# Altium PCB Automatic Water Pump Controller.PcbDoc
Units mm, origin at the board's own origin, x right, y up, seen from the top; angles counter-clockwise.
Board outline 79.6 x 78 mm, 2 copper layers (Top Layer, Bottom Layer); 35 components, 31 nets, 99 pads, 6 vias.
Unrouted connection lines stored in the file: 1.
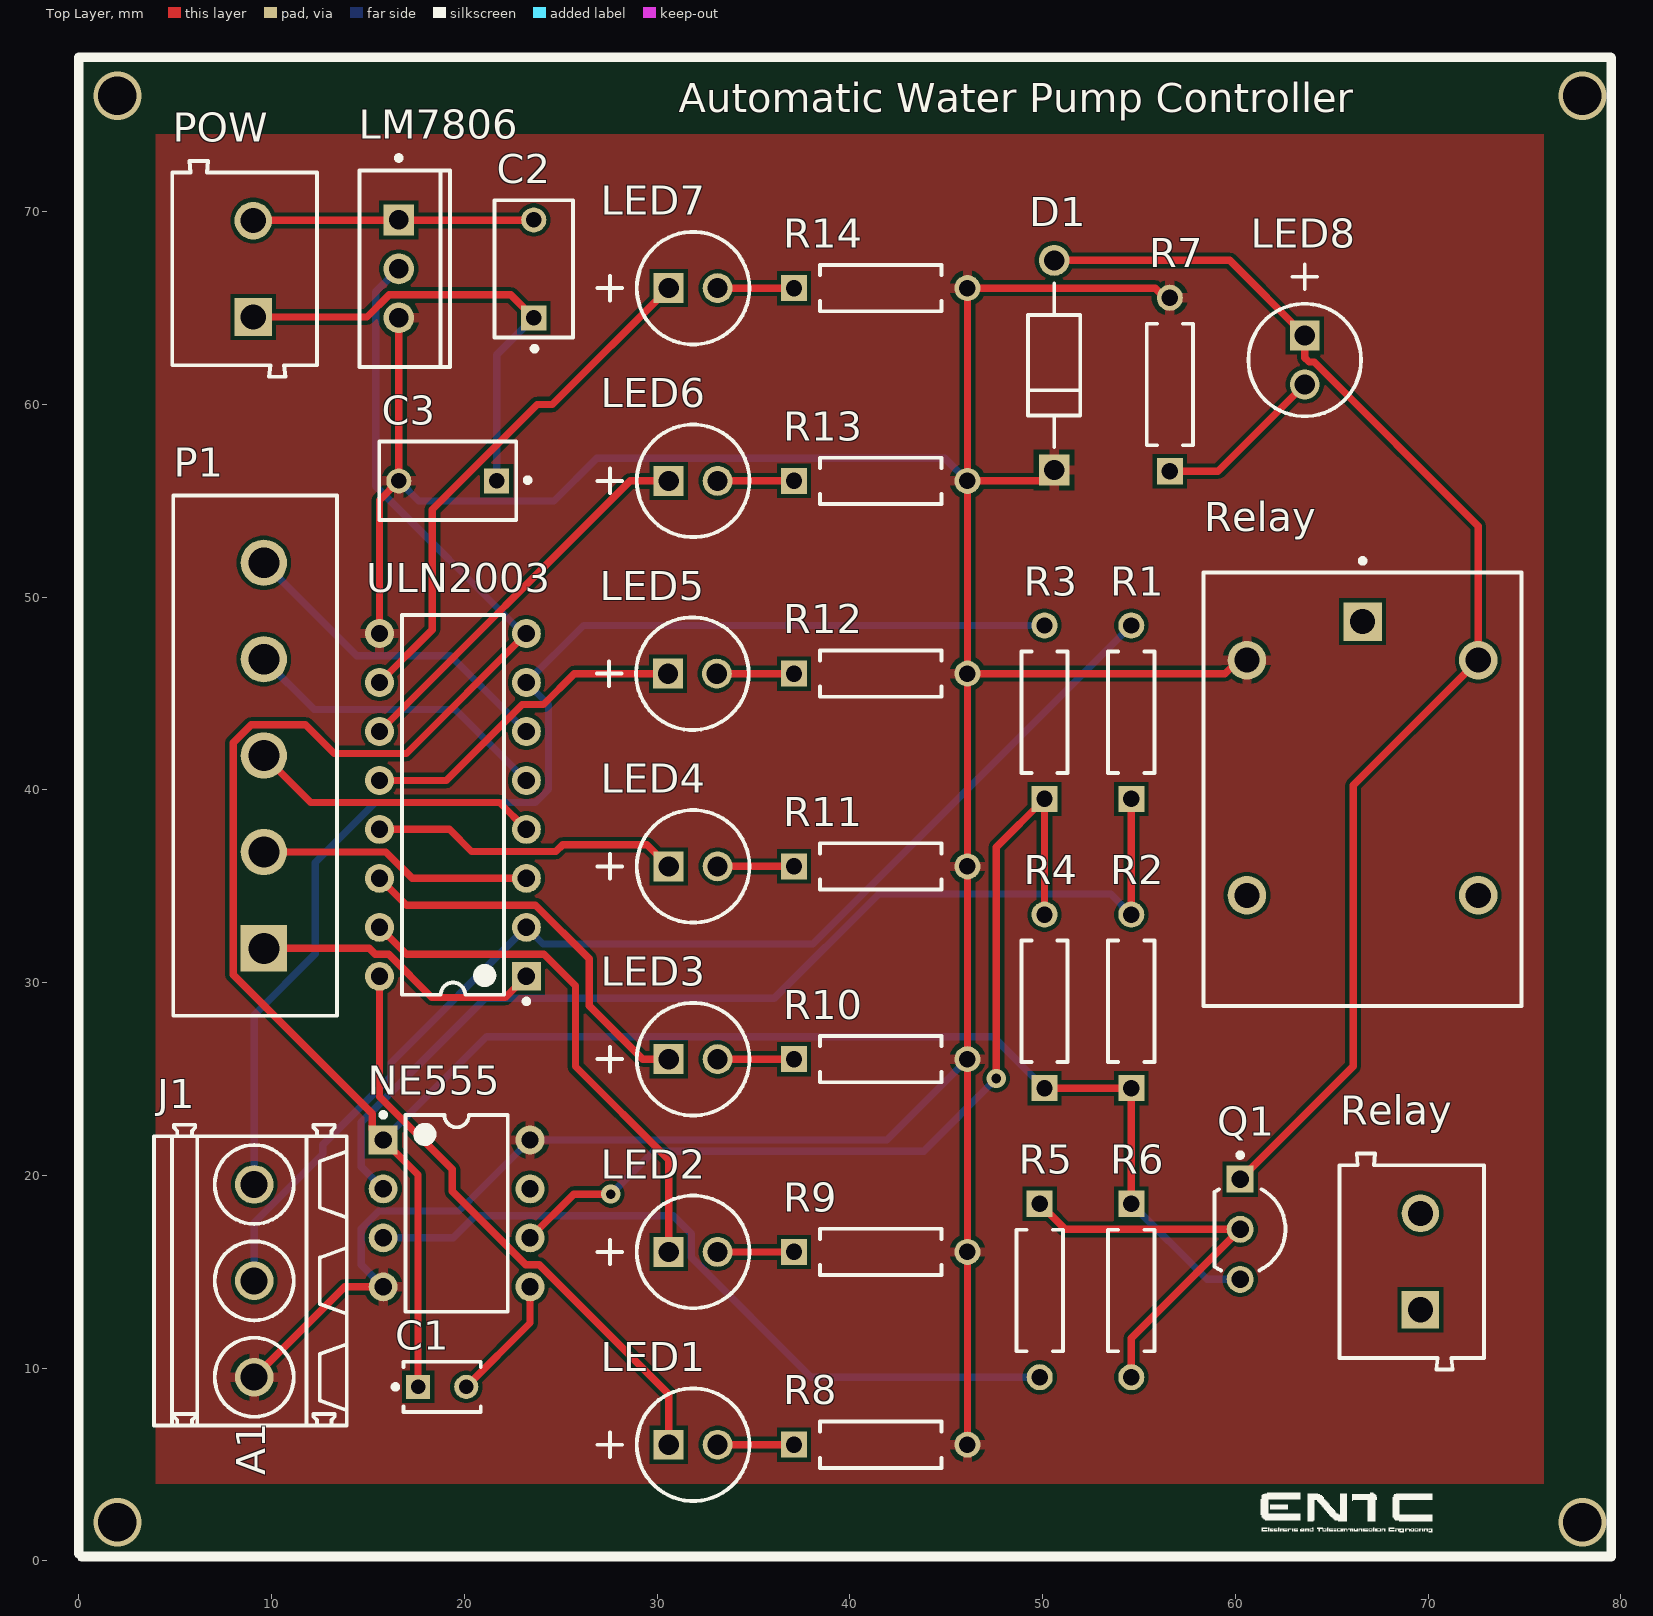
[diagram p0: Top Layer view]
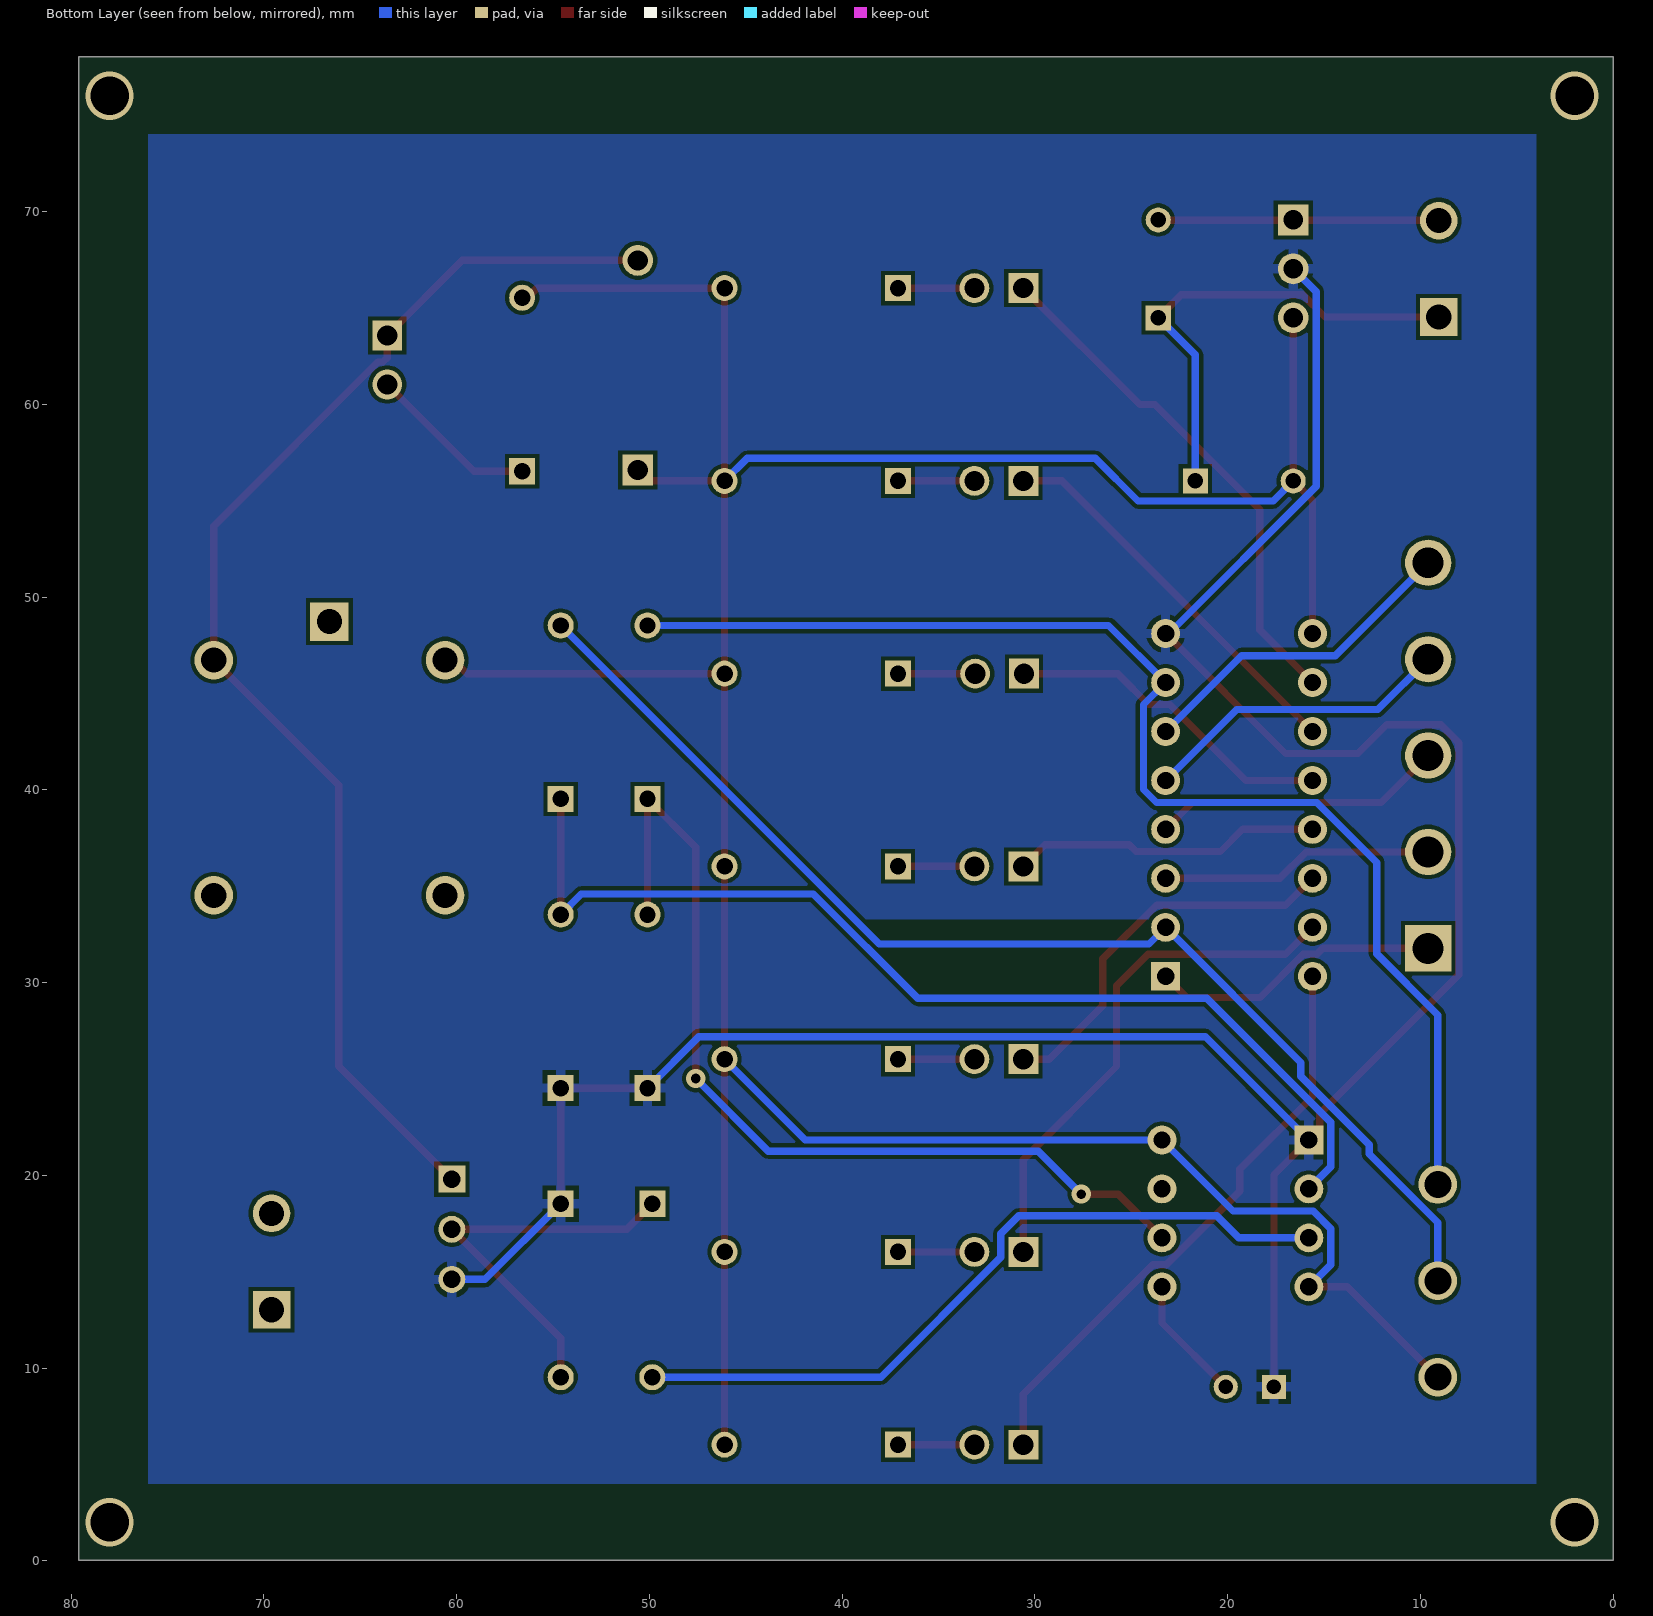
[diagram p1: Bottom Layer view, seen from below]

## Layer stack, top to bottom
Top Solder: solder mask 0.0102, Solder Resist, Dk 3.5
Top Layer: signal copper 0.0356
Dielectric 1: dielectric 0.32, FR-4, Dk 4.8
Bottom Layer: signal copper 0.0356
Bottom Solder: solder mask 0.0102, Solder Resist, Dk 3.5

## Board outline
0,0.025 79.6,0.025 79.6,78.025 0,78.025

## Design rules (kind name [scope] priority, off if disabled: settings)
BoardOutlineClearance [All] p1: gap=0.2 ignorepadtopadclearanceinfootprint=FALSE except(0.4: Arc-SplitBarrior Arc-SplitContinuation Track-SplitBarrior Track-SplitContinuation SMDPad-SplitBarrior SMDPad-SplitContinuation THPad-SplitBarrior THPad-SplitContinuation Via-SplitBarrior Via-SplitContinuation Fill-SplitBarrior Fill-SplitContinuation Poly-SplitBarrior Poly-SplitContinuation Region-SplitBarrior Region-SplitContinuation Text-SplitBarrior Text-SplitContinuation)
Clearance "Clearance Bottom Layer" [OnLayer('Bottom Layer')] p1: gap=0.203 ignorepadtopadclearanceinfootprint=TRUE except(0.254: Arc-Text Track-Text SMDPad-Text THPad-Text Via-Text Fill-Text Poly-Text Region-Text Text-Text)
Clearance "Clearance Top Layer" [OnLayer('Top Layer')] p2: gap=0.203 ignorepadtopadclearanceinfootprint=TRUE except(0.254: Arc-Text Track-Text SMDPad-Text THPad-Text Via-Text Fill-Text Poly-Text Region-Text Text-Text)
Clearance [All] p3: gap=0.2 ignorepadtopadclearanceinfootprint=FALSE except(0.089: Arc-Arc Arc-Track Arc-SMDPad Track-Track Track-SMDPad SMDPad-SMDPad; 0.127: Arc-Via Track-Via SMDPad-Via THPad-Via Via-Via; 0.254: Arc-Text Track-Text SMDPad-Text THPad-Text Via-Text Fill-Text Poly-Text Region-Text Text-Text)
HoleSize [All] p1: absolutevalues=TRUE maxlimit=6.3 minlimit=0.2 maxpercent=80.000 minpercent=20.000
MinimumAnnularRing [All] p1: minimumring=0.076
MinimumSolderMaskSliver [All] p1: minsoldermaskwidth=0.1
PolygonConnect PolygonConnect_1 [All] p1: thpad.connectstyle=Relief thpad.reliefconductorwidth=0.508 thpad.reliefentries=4 thpad.polygonreliefangle="90 Angle" thpad.airgapwidth=0.254 smdpad.connectstyle=Relief smdpad.reliefconductorwidth=0.508 smdpad.reliefentries=4 smdpad.polygonreliefangle="90 Angle" smdpad.airgapwidth=0.254 via.connectstyle=Direct via.reliefconductorwidth=0.508 via.reliefentries=4 via.polygonreliefangle="90 Angle" via.airgapwidth=0.254
RoutingCorners [All] p1: cornerstyle=Round minsetback=2.54 maxsetback=2.54
RoutingVias [All] p1: holewidth=0.5 width=1 viastyle="Through Hole" minholewidth=0.2 minwidth=0.45 maxholewidth=1 maxwidth=2
SilkToSilkClearance [All] p1: silktosilkclearance=0.1
SilkToSolderMaskClearance [IsPad] p1: minsilkscreentomaskgap=0.1 clearancetoexposedcopper=TRUE
SolderMaskExpansion [All] p1: expansion=0.102 istentingtop=FALSE
Width [All] p1: maxlimit=2.54 minlimit=0.089 preferedwidth=0.381
25 further rules are at their usual default settings.

## Components (designator, comment, footprint, x,y, rotation, side; value= is the part's Value field where it differs from the comment)
C1 "K104K15X7RF5TL2" VISH-K104K15X7RF5TL2 18.85,9.025 r0 top
C2 "C330C105M5U5TA" KEMT-C330C105M5U5TA 23.6,67.025 r90 top
C3 "C330C105M5U5TA" KEMT-C330C105M5U5TA 19.14,56.025 r180 top
D1 "IN4007" FP-1N4007-MFG 50.6,62.025 r90 top value=15pF
J1 "1715320000" LM_5_00_90_03 8.9,14.525 r90 top
LED1 "HLMP-3301" AVAG-HLMP-3301-2 30.6,6.025 r0 top
LED2 "HLMP-3301" AVAG-HLMP-3301-2 30.6,16.025 r0 top
LED3 "HLMP-3301" AVAG-HLMP-3301-2 30.6,26.025 r0 top
LED4 "HLMP-3301" AVAG-HLMP-3301-2 30.6,36.025 r0 top
LED5 "HLMP-3301" AVAG-HLMP-3301-2 30.56,46.025 r0 top
LED6 "HLMP-3301" AVAG-HLMP-3301-2 30.6,56.025 r0 top
LED7 "HLMP-3301" AVAG-HLMP-3301-2 30.6,66.025 r0 top
LED8 "HLMP-3301" AVAG-HLMP-3301-2 63.6,63.565 r270 top
LM7806 "LM7806" FAIR-TO-220-3 16.6,67.025 r0 top
NE555 "NE555" P0008A 19.6,18.025 r0 top
P1 "691311700105" 691311700105 9.15,41.775 r90 top
POW "691102710002" 691102710002 8.6,67.025 r90 top
Q1 "BC547BRL1G" ONSC-TO-92-3-29-11_AM_BL 60.25,17.2 r270 top
R1 "MFR-25FBF52-475K" RESA60-630X240 54.6,44.025 r90 top value=22K
R2 "MFR-25FBF52-475K" RESA60-630X240 54.6,29.025 r90 top value="1 M"
R3 "MFR-25FBF52-475K" RESA60-630X240 50.1,44.025 r90 top value="22 K"
R4 "MFR-25FBF52-475K" RESA60-630X240 50.1,29.025 r90 top value="1 M"
R5 "MFR-25FBF52-475K" RESA60-630X240 49.85,14.025 r270 top value="1 K"
R6 "MFR-25FBF52-475K" RESA60-630X240 54.6,14.025 r270 top value="220 K"
R7 "MFR-25FBF52-475K" RESA60-630X240 56.6,61.025 r90 top value="470 Ohm"
R8 "MFR-25FBF52-475K" RESA60-630X240 41.6,6.025 r0 top value="330 Ohm"
R9 "MFR-25FBF52-475K" RESA60-630X240 41.6,16.025 r0 top value="330 Ohm"
R10 "MFR-25FBF52-475K" RESA60-630X240 41.6,26.025 r0 top value="330 Ohm"
R11 "MFR-25FBF52-475K" RESA60-630X240 41.6,36.025 r0 top value="330 Ohm"
R12 "MFR-25FBF52-475K" RESA60-630X240 41.6,46.025 r0 top value="330 Ohm"
R13 "MFR-25FBF52-475K" RESA60-630X240 41.6,56.025 r0 top value="330 Ohm"
R14 "MFR-25FBF52-475K" RESA60-630X240 41.6,66.025 r0 top value="330 Ohm"
Relay "G5LE-14-DC5" FP-G5LE-14-DC5-MFG 66.6,40.025 r270 top
Relay "691102710002" 691102710002 69.15,15.525 r90 top
ULN2003 "ULN2003AN" N0016A 19.41,39.215 r180 top

## Footprints (in the part's own frame and the unit in brackets; to place one, negate y for a bottom-side part, rotate by r counter-clockwise, add the part's x,y. Pads: shape width x height; smd on the part's side, far side on the other; paste and mask are expansions set on the pad)
691102710002 [mm] "5,00mm - modular - blue - Horizontal entry with pressure clamp - 9,9 mm height - 02p"
  rect 1.95x1.95 hole 1.3: 1(-2.5,-0.45)
  round 1.95 hole 1.3: 2(2.5,-0.45)
  silkscreen extent -5.6,-3.75 5.6,3.75, body extent -5.6,-3.75 5.6,3.75, height 9.96
691311700105 [mm] "5.00mm - PCB Vertical Closed - 05p"
  rect 2.4x2.4 hole 1.6: 1(-10,-0.45)
  round 2.4 hole 1.6: 2(-5,-0.45) 3(0,-0.45) 4(5,-0.45) 5(10,-0.45)
  silkscreen extent -13.5,-4.25 13.5,4.25, body extent -13.5,-4.25 13.5,4.25, height 12.1
AVAG-HLMP-3301-2 [mm] "THD, 2-Leads, Body Dia 5.85mm"
  rect 1.55x1.55 hole 1.05: 1(0,0)
  round 1.55 hole 1.05: 2(2.54,0)
  silkscreen extent -3.68,-2.92 4.19,2.92
FAIR-TO-220-3 [mm] "FM, 3-Leads, Body 10.2x4.7mm, Pitch 2.54mm"
  rect 1.6x1.6 hole 1: 1(0,2.54)
  round 1.6 hole 1: 2(0,0) 3(0,-2.54)
  silkscreen extent -2.04,-5.1 2.66,5.87, body extent -2.04,-5.1 2.66,5.1, height 18.95
FP-1N4007-MFG [mm]
  rect 1.6x1.6 hole 1.05 paste-1000 mask+0: 1(-5.438,0)
  round 1.6 hole 1.05 paste-1000 mask+0: 2(5.438,0)
  silkscreen extent -4.24,-1.35 4.24,1.35, body extent -6.34,-1.45 6.34,1.45, height 0.25
FP-G5LE-14-DC5-MFG [mm]
  rect 2x2 hole 1.3 paste-1000 mask+0: 1(-8.7,0)
  round 2 hole 1.3 paste-1000 mask+0: 2(-6.7,-6) 3(5.5,-6) 4(5.5,6) 5(-6.7,6)
  silkscreen extent -11.97,-8.25 11.25,8.25, body extent -11.35,-8.35 11.35,8.35, height 0.25
KEMT-C330C105M5U5TA [mm] "THD, 2-Leads, Body 7.11x4.07mm"
  rect 1.3x1.3 hole 0.8: 1(-2.54,0)
  round 1.3 hole 0.8: 2(2.54,0)
  silkscreen extent -4.27,-2.03 3.55,2.03, body extent -3.55,-2.03 3.55,2.03, height 9.14
LM_5_00_90_03 [mm] "OMNIMATE Signal - Serie LM  LM 5.00/03/90 3.5"
  round 2 hole 1.4: A1(-5,-0.2) A2(0,-0.2) A3(5,-0.2)
  silkscreen extent -7.5,-5 8.1,5, body extent -7.5,-5 8.1,5, height 13.81
N0016A [mm] "DIP, 16-Leads, Body 19.7x6.6mm, Pitch 2.54mm"
  rect 1.5x1.5 hole 0.9: 1(-3.81,8.89)
  round 1.5 hole 0.9: 2(-3.81,6.35) 3(-3.81,3.81) 4(-3.81,1.27) 5(-3.81,-1.27) 6(-3.81,-3.81) 7(-3.81,-6.35) 8(-3.81,-8.89) 9(3.81,-8.89) 10(3.81,-6.35) 11(3.81,-3.81) 12(3.81,-1.27) 13(3.81,1.27) 14(3.81,3.81) 15(3.81,6.35) 16(3.81,8.89)
  silkscreen extent -3.94,-9.85 2.65,10.31, body extent -3.95,-9.85 3.95,9.85, height 5.08
ONSC-TO-92-3-29-11_AM_BL [mm] "TO, 3-Leads, Body Dia 4.7mm, Pitch 2.6mm"
  rect 1.4x1.4 hole 0.9: 1(-2.6,0)
  round 1.4 hole 0.9: 2(0,0) 3(2.6,0)
  silkscreen extent -3.97,-1.34 2.13,2.35, body extent -2.84,-1.34 2.84,2.35, height 5.33
P0008A [mm] "DIP, 8-Leads, Body 10.15x6.6mm, Pitch 2.54mm"
  rect 1.5x1.5 hole 0.9: 1(-3.81,3.81)
  round 1.5 hole 0.9: 2(-3.81,1.27) 3(-3.81,-1.27) 4(-3.81,-3.81) 5(3.81,-3.81) 6(3.81,-1.27) 7(3.81,1.27) 8(3.81,3.81)
  silkscreen extent -3.93,-5.1 2.65,5.23, body extent -3.95,-5.07 3.95,5.07, height 5.08
RESA60-630X240 [mm] "Axial Resistor, 2-Leads, Dia 2.4mm, Body Length 6.3mm"
  rect 1.35x1.35 hole 0.85: 1(-4.5,0)
  round 1.35 hole 0.85: 2(4.5,0)
  silkscreen extent -3.15,-1.2 3.15,1.2, body extent -4.77,-1.19 4.77,1.2, height 2.4
VISH-K104K15X7RF5TL2 [mm] "THD, 2-Leads, Body 4x2.6mm"
  rect 1.25x1.25 hole 0.75: 1(-1.25,0)
  round 1.25 hole 0.75: 2(1.25,0)
  silkscreen extent -2.55,-1.3 2,1.3, body extent -2,-1.3 2,1.3, height 5.6

## Part data
C1: library part CMP-2000-06508-1, "Ceramic Capacitor, 100 nF, +/- 10%, 50 V, -55 to 125 degC, 2-Pin THD, RoHS, Tape and Reel", Capacitance=0.1µF, Manufacturer=Vishay, Operating Temperature=-55°C~125°C, Package / Case=Radial, Package Description="2-Pin Through Hole Device, Body 4 x 2.6 mm", Ratings=-, Standard Package=1, Temperature Coefficient=X7R, Tolerance=±10%, Voltage - Rated=50V, Applications=GeneralPurpose, Catalog Drawings=Mono-KapSide2-15_5.58Mono-KapSide1_15, Category=Capacitors, Datasheet URL=http://www.vishay.com/docs/45171/kseries.pdf, Datasheet Version=08/2013, Family=CeramicCapacitors, Features=-, Height - Seated (Max)="0.220\"(5.58mm)", Lead Spacing="0.098\"(2.50mm)", Lead Style=Straight, Manufacturer URL=http://www.vishay.com/, Mounting Technology=ThroughHole, Mounting Type=ThroughHole, Online Catalog=Mono-Kap™Series, Other Names=BC1084CT, Package Reference=K104K15X7RF5TL2, Packaging=CutTape(CT), Series=Mono-Kap™K, Size / Dimension="0.157\"Lx0.098\"W(4.00mmx2.50mm)", Thickness (Max)=-
C2: library part CMP-2000-06056-1, "Ceramic Capacitor, 1 uF, +/- 20%, 50 V, -10 to 85 degC, 2-Pin THD, RoHS, Bulk", Capacitance=0.47µF, Manufacturer=Kemet, Operating Temperature=10°C~85°C, Package / Case=Radial, Package Description="2-Pin Through Hole Device, Body 7.11 x 4.07 mm", Ratings=-, Standard Package=250, Temperature Coefficient=Z5U, Tolerance=±20%, Voltage - Rated=50V, Applications=GeneralPurpose, Catalog Drawings=C330(std), Category=Capacitors, Datasheet URL=http://www.kemet.com/Lists/ProductCatalog/Attachments/599/KEM_C1051_GOLDMAX_Z5U.pdf, Datasheet Version=12/2015, Family=CeramicCapacitors, Features=-, Height - Seated (Max)="0.360\"(9.14mm)", Lead Spacing="0.200\"(5.08mm)", Lead Style=Straight, Manufacturer URL=http://www.kemet.com/, Mounting Technology=ThroughHole, Mounting Type=ThroughHole, Online Catalog=GoldenMax™Series, Other Names=399-4390, Package Reference=C330C105M5U5TA, Packaging=Bulk, PCN Design/Specification=C3yySeriesGoldenMaxLeadConfiguration02/Feb/2015, Product Training Modules=CapacitorBasics-TypicalUsesforCapacitors, Series=GoldenMax™, Size / Dimension="0.300\"Lx0.150\"W(7.62mmx3.81mm)", Thickness (Max)=-
C3: library part CMP-2000-06056-1, "Ceramic Capacitor, 1 uF, +/- 20%, 50 V, -10 to 85 degC, 2-Pin THD, RoHS, Bulk", Capacitance=0.1µF, Manufacturer=Kemet, Operating Temperature=10°C~85°C, Package / Case=Radial, Package Description="2-Pin Through Hole Device, Body 7.11 x 4.07 mm", Ratings=-, Standard Package=250, Temperature Coefficient=Z5U, Tolerance=±20%, Voltage - Rated=50V, Applications=GeneralPurpose, Catalog Drawings=C330(std), Category=Capacitors, Datasheet URL=http://www.kemet.com/Lists/ProductCatalog/Attachments/599/KEM_C1051_GOLDMAX_Z5U.pdf, Datasheet Version=12/2015, Family=CeramicCapacitors, Features=-, Height - Seated (Max)="0.360\"(9.14mm)", Lead Spacing="0.200\"(5.08mm)", Lead Style=Straight, Manufacturer URL=http://www.kemet.com/, Mounting Technology=ThroughHole, Mounting Type=ThroughHole, Online Catalog=GoldenMax™Series, Other Names=399-4390, Package Reference=C330C105M5U5TA, Packaging=Bulk, PCN Design/Specification=C3yySeriesGoldenMaxLeadConfiguration02/Feb/2015, Product Training Modules=CapacitorBasics-TypicalUsesforCapacitors, Series=GoldenMax™, Size / Dimension="0.300\"Lx0.150\"W(7.62mmx3.81mm)", Thickness (Max)=-
D1: library part CMP-02540-000046-1, "DIODE GEN PURP 1KV 1A DO204AL", Capacitance=15pF, Forward Current=1A, Manufacturer=Vishay, Manufacturer Part Number=1N4007-E3/54, Max Junction Temp=+150°C, Max Repetitive Reverse Voltage=1000V, Max Surge Forward Current=30A, Package=1N4007, Peak Reverse Current=30uA, Temperature="-50°C to +150°C", Temperature Range Low=-50°C, Automotive=No, Category=Diode, ComponentLink2Description=Datasheet, ComponentLink2URL=http://www.vishay.com/docs/88503/1n4001.pdf, Device Class L1="Discrete Semiconductors", Device Class L2=Diodes, Device Class L3="Rectifier Diodes", Digikey Description="DIODE GEN PURP 1KV 1A DO204AL", Height=2.7mm, Ipc Land Pattern Name=DIOPA1088W105L520D270, Lead Free=Yes, Mouser Description="Rectifiers Vr/1000V Io/1A", Octopart=https://octopart.com/1n4007-e3%2F54-vishay-39548207, RoHS=TRUE, Temperature Range High=+150°C
J1: library part CMP-1559-01747-1, "OMNIMATE Signal - series LM", Colour=Orange, Manufacturer=Weidmueller, Rated_current_use_group_B_UL_1059="15 A", Rated_voltage_for_surge_voltage_class_pollution_degree_II_2="630 V", Rated_voltage_use_group_B_UL_1059="300 V", UL_94_flammability_rating=V-0, ComponentLink1Description="Manufacturer URL", ComponentLink1URL=http://www.weidmueller.com/, ComponentLink2Description="URL Link1", ComponentLink2URL=http://catalog.weidmueller.com/catalog/Start.do?localeId=en&ObjectID=1715320000, Contact_material=Cu-Leg, Contact_surface=tinned, Insulating_material="Wemid (PA)", Mounting_onto_the_PCB="Solder connection", No_of_poles=3, PackageReference=LM_5_00_90_03, Packaging=Box, PartNumber=1715320000, Pitch_inch="0,197 inch", Pitch_mm="5 mm", Qty="500 PCS", Revision=V1, Short_text_for_material="LM 5.00/03/90 3.5SN OR BX", Side_termination_characteristic="closed side", Solder_pin_length_mm="3,5 mm", Solid_max_H05_07_V_U="2,5 mm²", Solid_min_H05_07_V_U="0,2 mm²", Wire_cross_section_AWG_max_UL_1059="AWG 14", Wire_cross_section_AWG_min_UL_1059="AWG 24"
LED1 LED2 LED3 LED4 LED5 LED6 LED7 LED8: library part CMP-2000-06411-1, "T-1 3/4 (5 mm) Diffused LED Lamp, 1.9 V, -40 to 100 degC, 2-Pin THD, RoHS, Bulk", Emitting Color=Red, Forward Current=25mA, Forward Voltage=2.4V, Manufacturer=Avago, Operating Temp Range=-40Cto100C, Operating Temperature Classification=Industrial, Package Description="2-Pin Through Hole LED, Dia 5.85 mm", Package Type=T-13/4, Power Dissipation=85W, Reverse Voltage=5V, Test Current (It)=10mA, Chip Material=GaP, Datasheet URL=http://www.avagotech.com/docs/AV02-1558EN, Datasheet Version=03/2015, DELETED=Compliant, Dominant Wave Length=626nm, High Brightness=No, Lens Dimensions=5.08x5.08x8.3mm, Lens Type=ColoredDiffused, Lum Intensity=5.4mcd, Luminous Intensity=5.4mcd, Main Category=StandardLED, Manufacturer URL=http://www.avagotech.com/, Mounting=ThroughHole, Mounting Technology=ThroughHole, Number of  Elements=1, Package Reference=HLMP-3301, Packaging=TapeandReel, Peak Wavelength=635nm, Pin Count=2, Product Depth (mm)=6.1mm, Product Height (mm)=9.19mm, Product Length (mm)=6.1mm, Rad Hardened=No, Shape Type=Circular, Type=Uni-Color, Viewing Angle=60deg
LM7806: library part CMP-2000-04938-1, "Positive Voltage Regulator, 5 V, 1 A, -40 to 125 degC, 3-Pin TO-220, RoHS, Tube", Manufacturer=FairchildSemiconductor, Maximum Input Voltage=35V, Maximum Output Current=2.2(Typ)A, Maximum Quiescent Current=8mA, Operating Temperature=-40to125degC, Output Voltage=5V, Package=3TO-220AB, Package Description="3-Pin Through Hole Device, Body 10 x 4.5 mm, Pitch 2.54 mm", Package Reference=TO-220, Typical Dropout Voltage @ Current=2@1AV, Accuracy=±4%, Category=LinearRegulator, Datasheet URL=https://datasheet.ciiva.com/26904/lm7805ct-26904988.pdf, Datasheet Version=Aug-12, Line Regulation=100mV, Load Regulation=100mV, Manufacturer URL=https://www.fairchildsemi.com/, Mounting=ThroughHole, Number of Outputs=1, Output Type=Fixed, Package URL=https://www.fairchildsemi.com/package-drawings/TO/TO220B03.pdf, Packaging=Rail/Tube, Polarity=Positive, Rad Hard=No, Type=Linear
NE555: library part CMP-2000-04954-1, "Precision Timer, 4.5 to 16 V, 0 to 70 degC, 8-Pin DIP, Pb-Free, Tube", Manufacturer=TexasInstruments, Maximum High Level Output Current=-200mA, Maximum Low Level Output Current=200mA, Operating Supply Voltage=5, Package=8PDIP, Package Description="8-Pin Double In-line Package, Body 9.59 x 6.35 mm, Pitch 2.54 mm", Package Reference=P8, Category=Timer, Datasheet URL=http://www.ti.com/general/docs/lit/getliterature.tsp?genericPartNumber=NE555&fileType=pdf, Datasheet Version="Rev. I, 09/2014", Manufacturer URL=http://www.ti.com/, Number of Internal Timers=1, Package URL=http://www.ti.com/lit/ml/mpdi001b/mpdi001b.pdf, Packaging=Rail/Tube, Rad Hard=No, Type=Standard
P1: library part CMP-1502-02036-1, "Serie 3117 - 5.00mm Close Vertical PCB Header WR-TBL, 5 pin", Manufacturer="Wurth Elektronik", Operating Temperature=-40to105degC, Datasheet URL=http://katalog.we-online.de/em/datasheet/6913117001xx.pdf, Gender=Male, Manufacturer URL=http://www.we-online.de, Mounting Technology=THT, Package Reference=691311700105, Packaging=Box, Part Number=691311700105, Pin Number=5, Pitch=5.00mm, Publisher=WurthElektronik
POW Relay: library part CMP-1502-03258-1, "Series 102 - 5.00 mm Horizontal Entry Modular with Pressure Clamp WR-TBL, 2 pin", Manufacturer="Wurth Elektronik", Operating Temperature=-40to105degC, Datasheet URL=http://katalog.we-online.de/em/datasheet/6911027100xx.pdf, Manufacturer URL=http://www.we-online.de, Mounting Technology=THT, Package Reference=691102710002, Packaging=Box, Part Number=691102710002, Pin Number=2, Pitch=5.00mm, Publisher=WurthElektronik
Q1: library part CMP-1048-01605-1, "Amplifier Transistor, NPN Silicon, 3-Pin TO-92, Pb-Free, Tape and Reel", Manufacturer="On Semiconductor", ComponentLink1Description="Manufacturer URL", ComponentLink1URL=http://www.onsemi.com/, ComponentLink2Description=Datasheet, ComponentLink2URL=http://www.onsemi.com/pub_link/Collateral/BC546-D.PDF, ComponentLink3Description="Package Specification", ComponentLink3URL=http://www.onsemi.com/pub_link/Collateral/MAC97-D.PDF, DatasheetVersion="Rev. 7", fT Min (MHz)=150, IC Continuous (A)=0.1, Mounting Technology="Through Hole", PackageDescription="3-Pin Transistor Outline, Body 4.825 x 3.685 mm, Pitch 1.27 mm", PackageReference=TO-92-3-29-11_AM_BL, PackageVersion="Rev. AM", Packing="Tape and Reel", PartNumber=BC547BRL1G, Polarity=NPN, RoHS=TRUE
R1 R2 R3 R4 R5 R6 R7 R8 R9 R10 R11 R12 R13 R14: library part CMP-009-00055-4, "Axial Resistor, 475 KOhm, +/- 1%, 0.25 W, -55 to 155 degC, 2-Pin THD, RoHS, Bulk", Case/Package=Axial, Manufacturer=Yageo, Max Operating Temperature=155°C, Min Operating Temperature=-55°C, Package Description="2-Pin Axial Lead, Dia 2.4 mm, Body Length 6.3 mm", Package Quantity=200, Package Reference=MFR-25, Power=250mW, Tolerance=1%, Voltage Rating=250V, Datasheet URL=http://www.yageo.com/documents/recent/Yageo%20LR_MFR_2013.pdf, Datasheet Version=Apr-13, Manufacturer URL=http://www.yageo.com/, Mounting Technology=TH, Packaging=Bulk, RoHS Compliant=True
Relay: library part CMP-08822-000008-1, "RELAY GEN PURPOSE SPDT 10A 5V", Ambient Temperature Range High=+85°C, Ambient Temperature Range Low=-25°C, Coil Current=79.4mA, Coil Power=400mW, Coil Resistance=63Ω, Coil Voltage=5V, Current Rating=10A, Manufacturer=Omron, Package=0, Temperature="-25°C to +85°C", Automotive=No, Category=Relay, Coil Type=Non-Latching, ComponentLink2Description=Datasheet, ComponentLink2URL=https://omronfs.omron.com/en_US/ecb/products/pdf/en-g5le.pdf, Device Class L1=Electromechanical, Device Class L2=Relays, Device Class L3="Power Relays", Digikey Description="RELAY GEN PURPOSE SPDT 10A 5V", Height=19mm, Lead Free=Yes, Manufacturer Part Number=G5LE-14-DC5, Mouser Description="General Purpose Relays Power PCB Relay SPDT Sealed 5VDC", Number Of Contacts=1, Octopart=https://octopart.com/g5le-14-dc5-omron-28829, RoHS=TRUE, Standoff Height=0.5mm, Switching Current=10A, Temperature Range High=+85°C, Temperature Range Low=-25°C, Throw Configuration=SPDT
ULN2003: library part CMP-2000-07352-1, "High-Voltage, High-Current Darlington Transistor Array, 50 V, 500 mA, -20 to 70 degC, 16-Pin PDIP (N), Pb-Free (RoHS), Tube", Manufacturer=TexasInstruments, Maximum Collector Emitter Saturation Voltage=1.1@100mA, Maximum Collector Emitter Voltage=50V, Package=16PDIP, Package Description="16-Pin Plastic In-Line, Body 19.305 x 6.35 mm, Pitch 2.54 mm", Package Reference=N16, Package Version="4040049/E, 12/2002", Peak DC Collector Current=0.5A, Category=DarlingtonBJT, Configuration=Array7, Datasheet URL=http://www.ti.com/general/docs/lit/getliterature.tsp?genericPartNumber=uln2003a&fileType=pdf, Datasheet Version="Rev. O, 01/2016", Manufacturer URL=http://www.ti.com/, Mounting=ThroughHole, Mounting Technology=ThroughHole, Package URL=http://www.ti.com/litv/pdf/mpdi002c, Packaging=Rail/Tube, Rad Hard=No, Type=NPN

## Via types
v1: diameter 2.5, hole 2, Top Layer to Bottom Layer, 4 vias
v2: diameter 1, hole 0.5, Top Layer to Bottom Layer, 2 vias

## Nets (pads, with @x,y where several pads share a name; then routed paths per layer and width w, separated by ;. In a path a pad name is that pad's centre, name@x,y a point inside that pad or via, vN(x,y) a via of type N, cw(c..) or ccw(c..) an arc to the next point about the centre after c; other vN are vias at no path point)
GND: C1.1 C2.1 C3.1 LM7806.2 NE555.1 POW.1 Q1.3 R2.1 R4.1 R6.1 ULN2003.8 | length 159.1
  Top Layer w0.381: POW.1 14.952,64.525 16.106,65.679 22.406,65.679 C2.1 ; C1.1 17.6,20.025 NE555.1 15.23,22.395 15.23,23.188 8.006,30.412 8.006,42.435 8.94,43.369 11.763,43.369 13.251,41.881 16.996,41.881 ULN2003.8 ; R4.1 R2.1 R6.1
  Bottom Layer w0.381: NE555.1 21.149,27.194 47.431,27.194 R4.1 ; LM7806.2 15.406,65.831 15.406,55.743 23.044,48.105 ULN2003.8 ; C3.1 21.68,62.565 C2.1 ; R6.1 58.525,14.6 Q1.3
NetC1_2: C1.2 NE555.5 | length 6.6
  Top Layer w0.381: C1.2 23.41,12.335 NE555.5
NetC2_2: C2.2 LM7806.1 POW.2 | length 14.6
  Top Layer w0.381: POW.2 9.07,69.545 23.58,69.545 C2.2
NetD1_2: D1.2 LED8.1 Q1.1 Relay.5 | length 67.4
  Top Layer w0.381: D1.2 59.702,67.463 LED8.1 63.6,62.417 63.823,62.194 64.084,62.194 72.6,53.678 Relay.5 66.112,40.237 66.112,25.662 Q1.1
NetJ1_A2: J1.A2 R1.2 ULN2003.2 | length 62.8
  Bottom Layer w0.381: J1.A2 9.1,17.554 12.654,21.108 12.654,21.582 16.208,25.136 16.208,25.853 ULN2003.2 24.085,32 38.075,32 R1.2
NetJ1_A3: J1.A3 R3.2 ULN2003.7 | length 65.8
  Bottom Layer w0.381: J1.A3 9.1,28.318 12.268,31.486 12.268,36.23 15.379,39.341 23.694,39.341 24.364,40.011 24.364,44.421 ULN2003.7 26.18,48.525 R3.2
NetLED1_1: LED1.1 ULN2003.16 | length 30.9
  Top Layer w0.381: ULN2003.16 15.6,24.082 19.375,20.307 19.375,19.172 23.189,15.359 23.884,15.359 30.6,8.642 LED1.1
NetLED1_2: LED1.2 R8.1 | length 4
  Top Layer w0.381: LED1.2 R8.1
NetLED2_1: LED2.1 ULN2003.15 | length 27.2
  Top Layer w0.381: ULN2003.15 16.996,31.469 24.133,31.469 25.763,29.839 25.763,25.643 30.6,20.806 LED2.1
NetLED2_2: LED2.2 R9.1 | length 4
  Top Layer w0.381: LED2.2 R9.1
NetLED3_1: LED3.1 ULN2003.14 | length 20.3
  Top Layer w0.381: ULN2003.14 16.996,34.009 23.694,34.009 26.474,31.229 26.474,28.805 29.254,26.025 LED3.1
NetLED3_2: LED3.2 R10.1 | length 4
  Top Layer w0.381: LED3.2 R10.1
NetLED4_1: LED4.1 ULN2003.13 | length 16.1
  Top Layer w0.381: ULN2003.13 19.226,37.945 20.37,36.801 24.75,36.801 25.097,37.148 29.477,37.148 LED4.1
NetLED4_2: LED4.2 R11.1 | length 4
  Top Layer w0.381: LED4.2 R11.1
NetLED5_1: LED5.1 ULN2003.12 | length 17.3
  Top Layer w0.381: ULN2003.12 19.063,40.485 22.999,44.421 24.105,44.421 25.709,46.025 LED5.1
NetLED5_2: LED5.2 R12.1 | length 4
  Top Layer w0.381: LED5.2 R12.1
NetLED6_1: LED6.1 ULN2003.11 | length 20.4
  Top Layer w0.381: ULN2003.11 28.6,56.025 LED6.1
NetLED6_2: LED6.2 R13.1 | length 4
  Top Layer w0.381: LED6.2 R13.1
NetLED7_1: LED7.1 ULN2003.10 | length 27.1
  Top Layer w0.381: ULN2003.10 18.341,48.306 18.341,54.542 23.79,59.991 24.566,59.991 LED7.1
NetLED7_2: LED7.2 R14.1 | length 4
  Top Layer w0.381: LED7.2 R14.1
NetLED8_2: LED8.2 R7.1 | length 8.9
  Top Layer w0.381: R7.1 59.1,56.525 LED8.2
NetNE555_2: NE555.2 R1.1 R2.2 | length 55.2
  Top Layer w0.381: R2.2 R1.1
  Bottom Layer w0.381: NE555.2 14.646,20.439 14.646,22.748 21.08,29.181 36.082,29.181 41.495,34.594 53.531,34.594 R2.2
NetNE555_3: NE555.3 R5.2 | length 38.7
  Bottom Layer w0.381: NE555.3 19.416,16.755 20.56,17.899 30.833,17.899 31.769,16.963 31.769,15.744 37.987,9.525 R5.2
NetNE555_6: NE555.6 R3.1 R4.2 | length 49.2
  Top Layer w0.381: NE555.6 25.68,19.025 v2(27.6,19.025) ; v2(47.6,25.025) 47.6,37.025 R3.1 R4.2
  Bottom Layer w0.381: v2(27.6,19.025) 29.826,21.251 43.826,21.251 v2(47.6,25.025)
NetP1_1: P1.1 ULN2003.1 | length 15.1
  Top Layer w0.381: P1.1 15.073,31.775 15.379,31.469 16.074,31.469 18.316,29.227 22.122,29.227 ULN2003.1
NetP1_2: P1.2 ULN2003.3 | length 14.2
  Top Layer w0.381: P1.2 15.927,36.775 17.297,35.405 ULN2003.3
NetP1_3: P1.3 ULN2003.4 | length 15.2
  Top Layer w0.381: P1.3 12.034,39.341 21.824,39.341 ULN2003.4
NetP1_4: P1.4 ULN2003.5 | length 16.2
  Bottom Layer w0.381: P1.4 12.206,44.169 19.536,44.169 ULN2003.5
NetP1_5: P1.5 ULN2003.6 | length 17.2
  Bottom Layer w0.381: P1.5 14.414,46.961 19.284,46.961 ULN2003.6
NetQ1_2: Q1.2 R5.1 R6.2 | length 21
  Top Layer w0.381: R5.1 51.175,17.2 Q1.2 54.6,11.55 R6.2
VCC: C3.2 D1.1 J1.A1 LM7806.3 NE555.4 NE555.8 R7.2 R8.2 R9.2 R10.2 R11.2 R12.2 R13.2 R14.2 Relay.2@60.6,46.725 ULN2003.9 | length 185.6
  Top Layer w0.381: J1.A1 13.79,14.215 NE555.4 ; ULN2003.9 15.6,55.025 C3.2 LM7806.3 ; R8.2 R9.2 R10.2 R11.2 R12.2 ; D1.1 50.038,56.025 R13.2 ; R7.2 56.338,65.525 55.838,66.025 R14.2 R13.2 ; Relay.2@60.6,46.725 60.162,46.725 59.462,46.025 R12.2 ; R12.2 R13.2
  Bottom Layer w0.381: NE555.4 14.646,15.359 14.646,17.229 15.569,18.151 19.726,18.151 NE555.8 41.91,21.835 R10.2 ; C3.2 17.644,54.981 24.652,54.981 26.864,57.194 44.931,57.194 R13.2
pads on no net: NE555.7 Relay.1 Relay.2@69.6,18.025 Relay.3 Relay.4
copper on no net:
  other v1: 2,2 78,2 2,76 78,76

## Polygon pours and split planes (outlines as drawn)
VCC on Top Layer "VCC_L01_P001" (solid, remove dead copper, pour order 1): 4,74 4,4 76,4 76,74
GND on Bottom Layer "GND_L02_P002" (solid, remove dead copper, pour order 2): 4,74 4,4 76,4 76,74

## Silkscreen, mask and mechanical layers (free items; w line width, h text height)
Top Overlay:
  drawing of 53 lines, arcs and shapes, not listed
  text "Automatic Water Pump Controller" at 31.129,75.137 h1.52

## Text inside footprints (layer, text, board x,y; h text height)
J1: Top Overlay "A1" at 9.661,4.45 h1.5 r90